# Altium PCB cs301_YourGroupNumber--4 holes.PcbDoc
Units mil, origin at the board's own origin, x right, y up, seen from the top; angles counter-clockwise.
Board outline 10825 x 6635 mil, 2 copper layers (Top Layer, Bottom Layer); 74 components, 39 nets, 199 pads, 12 vias.
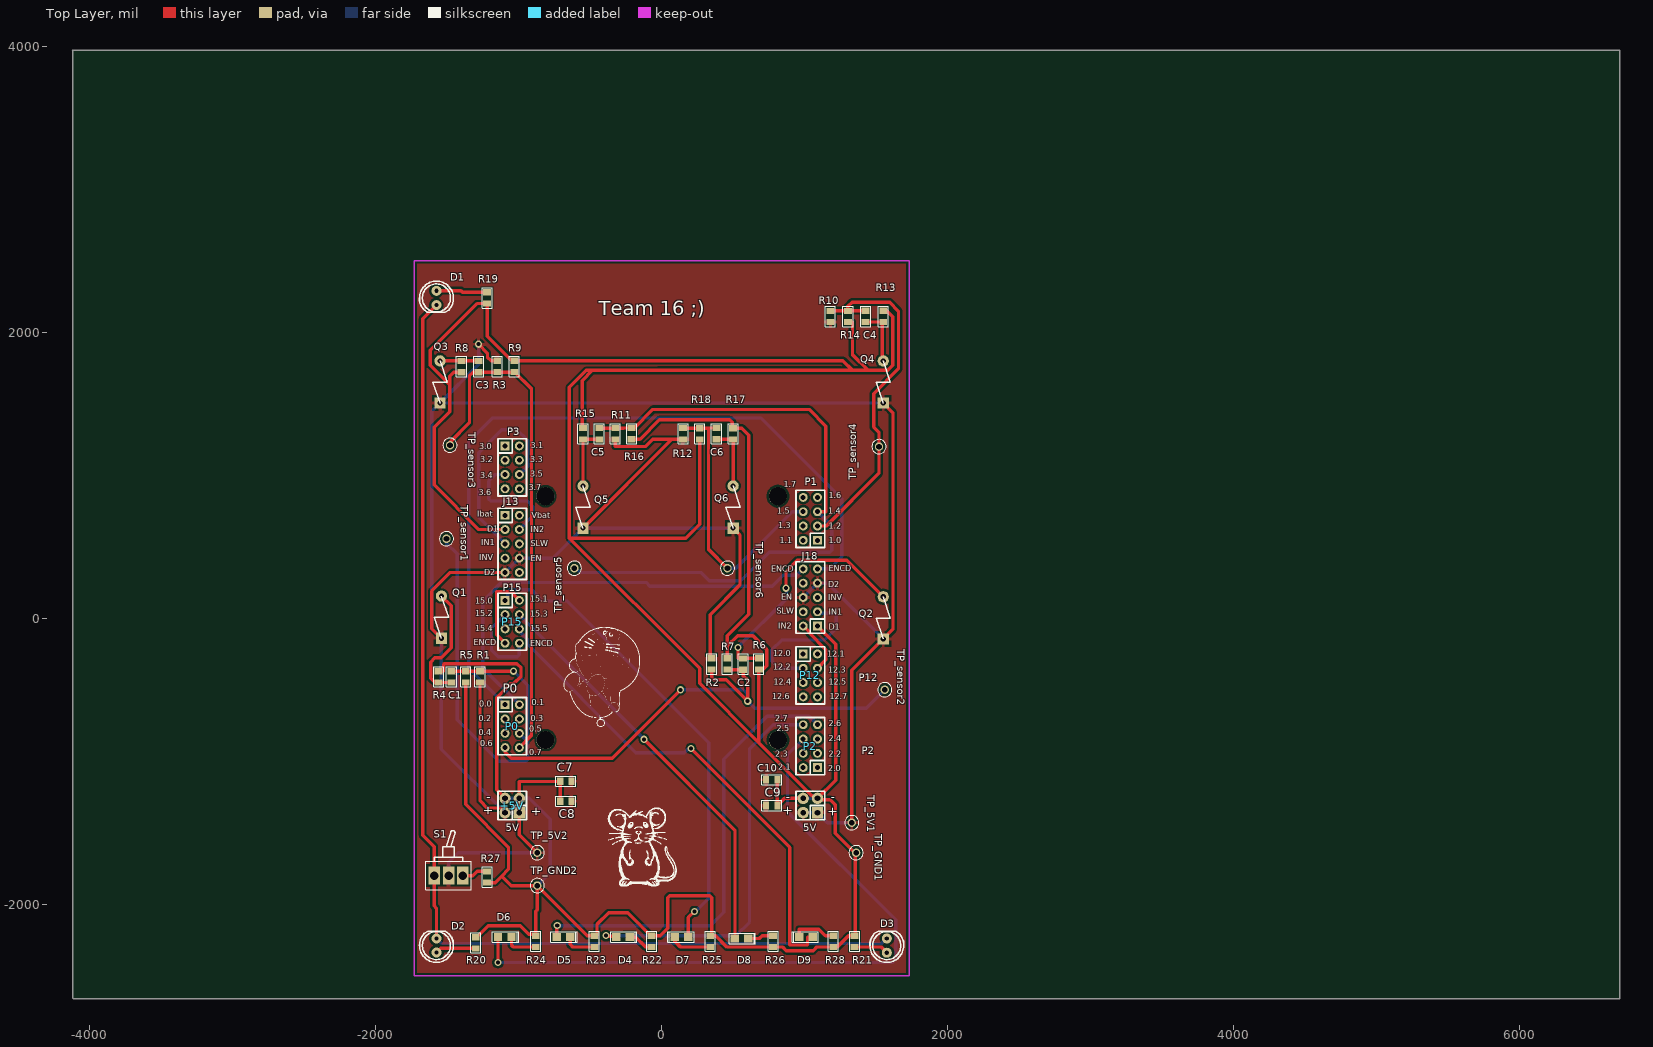
[diagram p0: Top Layer view]
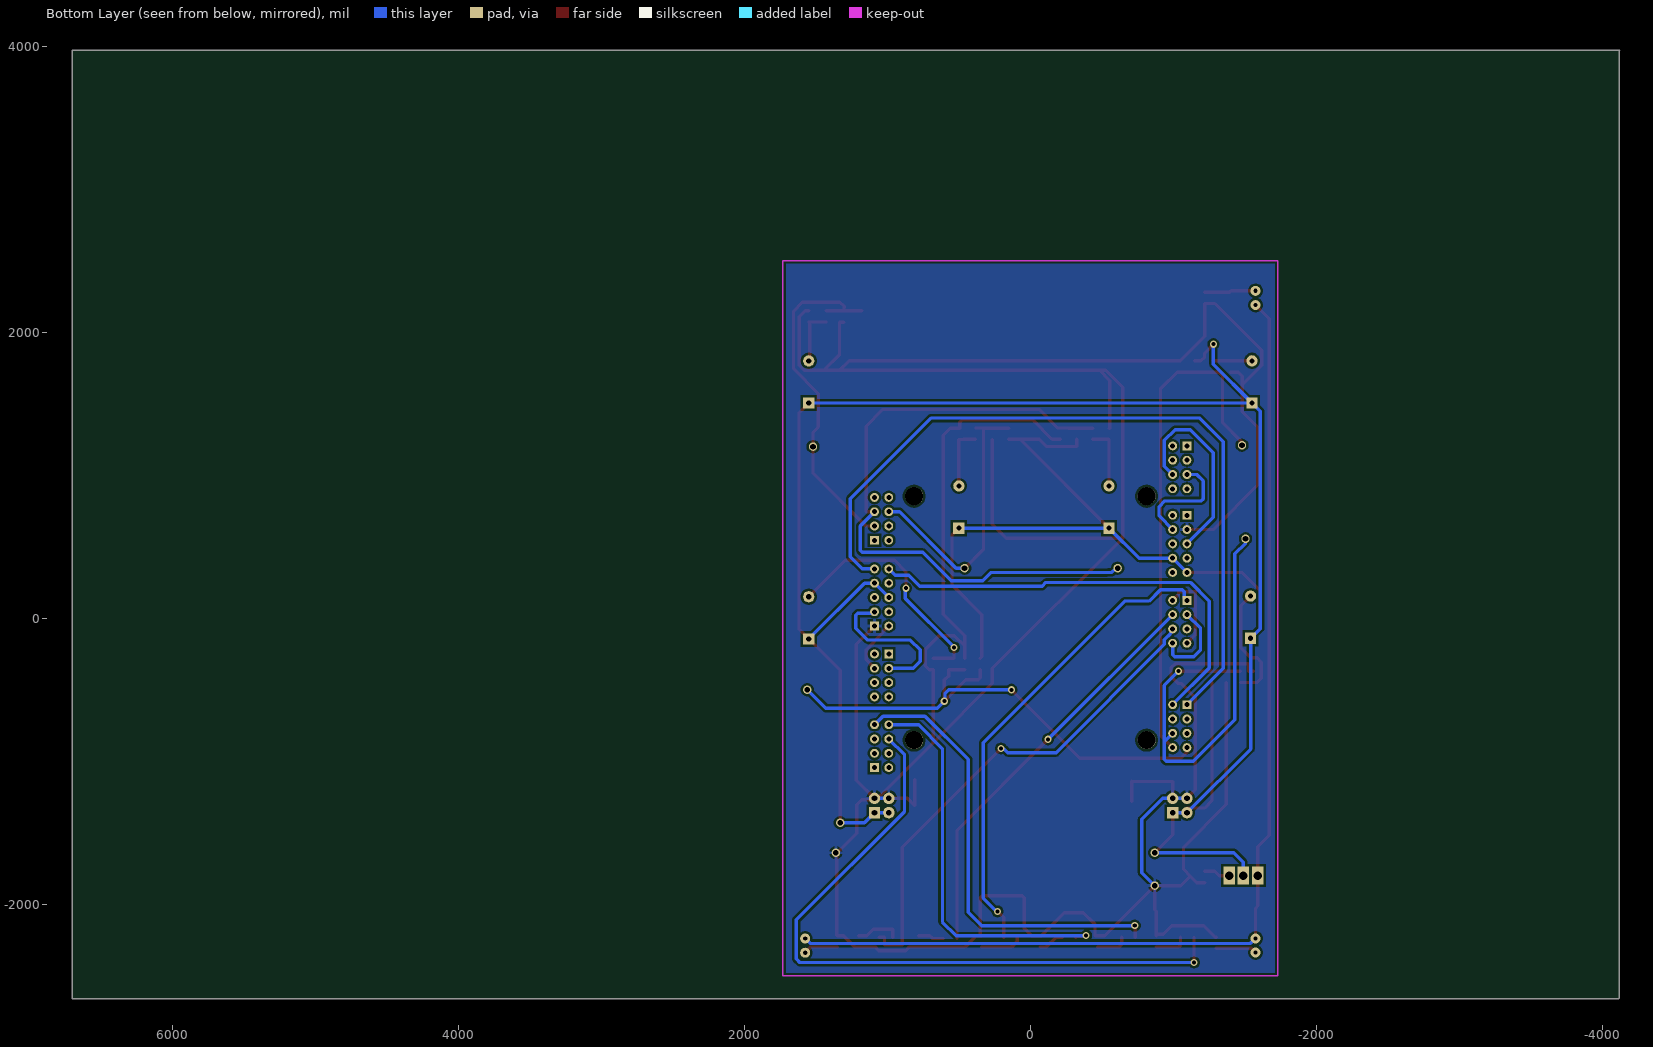
[diagram p1: Bottom Layer view, seen from below]

## Layer stack, top to bottom
Top Solder: solder mask 0.4, Solder Resist, Dk 3.5
Top Layer: signal copper 1.4
Dielectric1: dielectric 12.6, FR-4, Dk 4.8
Bottom Layer: signal copper 1.4
Bottom Solder: solder mask 0.4, Solder Resist, Dk 3.5

## Board outline
-4118.11,-2656.69 -4113.11,-2661.69 6701.89,-2661.69 6701.89,3973.31 -4123.11,3973.31 -4118.11,3968.31 -4118.11,-2656.69

## Design rules (kind name [scope] priority, off if disabled: settings)
Clearance [All] p1: gap=15.75 ignorepadtopadclearanceinfootprint=FALSE
Height [All] p1: minheight=0 maxheight=984.25 prefheight=500
HoleSize [All] p1: absolutevalues=TRUE maxlimit=393.7 minlimit=15.75 maxpercent=80.000 minpercent=20.000
PolygonConnect [All] p1: connectstyle=Relief reliefconductorwidth=23.62 reliefentries=4 polygonreliefangle="90 Angle" airgapwidth=15.75
RoutingVias [All] p1: holewidth=28 width=50 viastyle="Through Hole" minholewidth=28 minwidth=50 maxholewidth=28 maxwidth=50
SilkToSilkClearance [All] p1: silktosilkclearance=3.94
SilkToSolderMaskClearance SilkscreenOverComponentPads [IsPad] p1: minsilkscreentomaskgap=3.94 clearancetoexposedcopper=TRUE
SolderMaskExpansion [All] p1: expansion=4 istentingtop=FALSE
Width [All] p1: maxlimit=393.7 minlimit=15.75 preferedwidth=23.62
26 further rules are at their usual default settings.

## Components (designator, comment, footprint, x,y, rotation, side; value= is the part's Value field where it differs from the comment)
5V "5V" IDC4 1090,-1360 r90 top locked
+5V "5V" IDC4 -995,-1360 r90 top locked
C1 "*" "0805 CAP" -1470,-410 r90 top
C2 "*" "0805 CAP" 570,-320.63 r270 top
C3 "*" "0805 CAP" -1280,1760 r270 top
C4 "*" "0805 CAP" 1426.67,2110.63 r90 top
C5 "*" "0805 CAP" -436.67,1290 r90 top
C6 "*" "0805 CAP" 383.33,1290.63 r90 top
C7 "4.7uF" "0805 CAP" -670,-1140 r180 top
C8 "100nF" "0805 CAP" -670,-1280 r180 top
C9 "4.7nF" "0805 CAP" 770,-1310 r0 top
C10 "100nF" "0805 CAP" 770,-1130 r0 top
D1 "LED" LED0.1/5MM#1 -1574.8,2189.76 r180 top locked
D2 "LED" LED0.1/5MM#2 -1574.8,-2239.37 r0 top locked
D3 "LED" LED0.1/5MM#1 1574.8,-2239.37 r0 top locked
D4 "LTST-C170KGKT" "0805 LED" -270,-2230 r0 top
D5 "LTST-C170KGKT" "0805 LED" -687.24,-2230 r0 top
D6 "LTST-C170KGKT" "0805 LED" -1097.24,-2230 r0 top
D7 "LTST-C170KGKT" "0805 LED" 140,-2230 r180 top
D8 "LTST-C170KGKT" "0805 LED" 560,-2240 r0 top
D9 "LTST-C170KGKT" "0805 LED" 1010,-2230 r180 top
J13 "CON10" IDC10 -1095,720 r270 top locked
J18 "CON10" IDC10 1090,-55 r90 top locked
P0 "P0" idc8 -1095,-605 r270 top locked
P1 "P1" idc8 1090,545 r90 top locked
P2 "P2" idc8 1090,-1045 r90 top locked
P3 "P3" idc8 -1095,1205 r270 top locked
P12 "P12" idc8 990,-250 r270 top locked
P15 "P15" IDC8 -1095,125 r270 top locked
Q1 "VEMT3700" VEMT3700 -1390,-240 r90 top
Q2 "VEMT3700" VEMT3700 1700,-245 r90 top
Q3 "VEMT3700" VEMT3700 -1400,1405 r90 top
Q4 "VEMT3700" VEMT3700 1700,1405 r90 top
Q5 "VEMT3700" VEMT3700 -400,530 r90 top
Q6 "VEMT3700" VEMT3700 650,530 r90 top
R1 "*" "0805 RES" -1270,-410 r270 top
R2 "*" "0805 RES" 350,-320 r90 top
R3 "*" "0805 RES" -1150,1760.63 r90 top
R4 "*" "0805 RES" -1560,-410 r270 top
R5 "*" "0805 RES" -1370,-410 r90 top
R6 "*" "0805 RES" 680,-320 r90 top
R7 "*" "0805 RES" 460,-320 r270 top
R8 "*" "0805 RES" -1400,1760 r90 top
R9 "*" "0805 RES" -1030,1760.63 r270 top
R10 "*" "0805 RES" 1180,2110 r270 top
R11 "*" "0805 RES" -323.33,1290 r270 top
R12 "*" "0805 RES" 150,1290 r270 top
R13 "*" "0805 RES" 1550,2110.63 r270 top
R14 "*" "0805 RES" 1303.33,2110 r90 top
R15 "*" "0805 RES" -550,1290 r270 top
R16 "*" "0805 RES" -210,1290.63 r90 top
R17 "*" "0805 RES" 500,1289.37 r270 top
R18 "*" "0805 RES" 266.67,1289.37 r90 top
R19 "*" "0805 RES" -1220,2240 r90 top
R20 "*" "0805 RES" -1300,-2270 r270 top
R21 "*" "0805 RES" 1350,-2260 r270 top
R22 "*" "0805 RES" -70,-2260 r270 top
R23 "*" "0805 RES" -470,-2260 r270 top
R24 "*" "0805 RES" -880,-2260 r270 top
R25 "*" "0805 RES" 340,-2260 r270 top
R26 "*" "0805 RES" 780,-2260 r90 top
R27 "10k" "0805 RES" -1220,-1810 r90 top
R28 "*" "0805 RES" 1200,-2260 r90 top
S1 "SW-SPDT" SW-SPDT -1590,-1800 r0 top
TP_5V1 "5003" TP_TH 1330,-1430 r90 top
TP_5V2 "5003" TP_TH -870,-1640 r90 top
TP_GND1 "5003" TP_TH 1360,-1640 r90 top
TP_GND2 "5003" TP_TH -870,-1870 r90 top
TP_sensor1 "5003" TP_TH -1504.72,555.96 r90 top
TP_sensor2 "5003" TP_TH 1560,-500 r90 top
TP_sensor3 "5003" TP_TH -1480,1210 r90 top
TP_sensor4 "5003" TP_TH 1520,1200 r90 top
TP_sensor5 "5003" TP_TH -610,350 r90 top
TP_sensor6 "5003" TP_TH 460.41,350 r90 top

## Footprints (in the part's own frame and the unit in brackets; to place one, negate y for a bottom-side part, rotate by r counter-clockwise, add the part's x,y. Pads: shape width x height; smd on the part's side, far side on the other; paste and mask are expansions set on the pad)
"0805 CAP" [mm] "http://www.digikey.co.nz/Web%20Export/Supplier%20Content/Vishay_8026/PDF/VishayBeyschlag_SolderPad.pdf?redirected=1 with dimension G modified by +0.25mm"
  rect 1.1x1.4 smd: 1(-1,0) 2(1,0)
  silkscreen extent -1.8,-0.9 1.8,0.9, body extent -1.04,-0.66 1.04,0.66, height 0.61
"0805 LED" [mm] "RED AS AlGaAs SMD LED, Body; 2mm x 1.25 mm (LxW)"
  rect 1.5x1.4 smd: 1(-1.2,0) 2(1.2,0)
  silkscreen extent -2.2,-0.95 2.45,0.95, body extent -1,-0.63 1,0.63, height 1.1
"0805 RES" [mm] "http://www.digikey.co.nz/Web%20Export/Supplier%20Content/Vishay_8026/PDF/VishayBeyschlag_SolderPad.pdf?redirected=1 with dimension G modified by +0.25mm"
  rect 1.1x1.4 smd: 1(-1,0) 2(1,0)
  silkscreen extent -1.8,-0.9 1.8,0.9, body extent -1.04,-0.66 1.04,0.66, height 0.61
IDC4 [mil]
  rect 80x80 hole 40: 1(0,0)
  round 80 hole 40: 2(0,100) 3(100,0) 4(100,100)
  silkscreen extent -50,-50 150,150
idc8 [mil]
  rect 62x62 hole 35: 1(0,0)
  round 62 hole 35: 2(0,100) 3(100,0) 4(100,100) 5(200,0) 6(200,100) 7(300,0) 8(300,100)
  silkscreen extent -50,-50 350,150
IDC8 [mil]
  rect 62x62 hole 35: 1(0,0)
  round 62 hole 35: 2(0,100) 3(100,0) 4(100,100) 5(200,0) 6(200,100) 7(300,0) 8(300,100)
  silkscreen extent -50,-50 350,150
IDC10 [mil]
  rect 62x62 hole 35: 1(0,0)
  round 62 hole 35: 2(0,100) 3(100,0) 4(100,100) 5(200,0) 6(200,100) 7(300,0) 8(300,100) 9(400,0) 10(400,100)
  silkscreen extent -50,-50 450,150
LED0.1/5MM#1 [mil]
  round 70 hole 30: A(0,0) K(0,-100)
  silkscreen extent -118,-168 118,50
LED0.1/5MM#2 [mil]
  round 70 hole 30: A(0,0) K(0,-98.42)
  silkscreen extent -118,-168 118,50
SW-SPDT [mil]
  rect 80x125 hole 60: 1(0,0) 2(100,0) 3(200,0)
  silkscreen extent -60,-100 260,315
TP_TH [mm] "Test Point, Through Hole, Dia 2.54mm"
  round 1.5 hole 1: 1(0,0)
  silkscreen extent -1.27,-1.27 1.27,1.27, body extent -1.27,-1.27 1.27,1.27, height 4.57
VEMT3700 [mm]
  rect 2x2 hole 0.9: 1(2.54,3.81)
  round 2 hole 0.9: 2(10.033,3.81)
  silkscreen extent 2.54,2.54 10.03,5.08

## Part data
5V +5V: library part CON4, "Connector"
C1 C2 C3 C4 C5 C6 C7 C8 C9 C10: library part CerCap_SMT_0805, "SMT ceramic capacitor 0805 size"
D4 D5 D6 D7 D8 D9: library part LED_SMT_0805, "SMT LED 0805 size", Color=Green, Current - Test=20mA, Lens Color=Colorless, Manufacturer="Lite-On Inc.", Millicandela Rating=35mcd, Package / Case="0805 (2012 Metric)", Supplier Part Number 1=160-1414-1-ND, Voltage - Forward (Vf) (Typ)=2V, Category=Optoelectronics, ComponentLink1Description=http://optoelectronics.liteon.com/upload/download/DS22-2000-073/LTST-C170KGKT.pdf, ComponentLink1URL=http://optoelectronics.liteon.com/upload/download/DS22-2000-073/LTST-C170KGKT.pdf, Features=-, Height (Max)=1.10mm, Lens Style/Size="Rectangle with Flat Top, 1.40mm x 1.25mm", Lens Transparency=Clear, Manufacturer Part Number=LTST-C170KGKT, Mounting Type="Surface Mount", Packaging="Cut Tape (CT)", Part Status=Active, Pricing 1="1=0.62, 10=0.459, 25=0.338, 100=0.2415, 250=0.16416, 500=0.14486, 1000=0.11347 (NZD)", RoHS="RoHS Compliant", Size / Dimension="2.00mm L x 1.25mm W", Stock 1=503069, Supplier 1=Digi-Key, Viewing Angle=130°, Wavelength - Dominant=571nm, Wavelength - Peak=574nm
J13 J18: "Connector"
P0 P1 P2 P3: library part CON8, "Connector"
P12 P15: library part CON8_1, "Connector"
Q1 Q2 Q3 Q4 Q5 Q6: "Silicon NPN Phototransistor"
R1 R2 R3 R4 R5 R6 R7 R8 R9 R10 R11 R12 R13 R14 R15 R16 R17 R18 R19 R20 R21 R22 R23 R24 R25 R26 R27 R28: library part Res_SMT_0805, "0805 resistor", ComponentLink1Description=https://nz.mouser.com/datasheet/2/315/AOA0000C304-1149620.pdf, LatestRevisionDate=17-Jul-2002, LatestRevisionNote="Re-released for DXP Platform.", PackageReference=AXIAL-0.4, Published=8-Jun-2000, Publisher="Altium Limited"
S1: "Toggle Switch"
TP_5V1 TP_5V2 TP_GND1 TP_GND2 TP_sensor1 TP_sensor2 TP_sensor3 TP_sensor4 TP_sensor5 TP_sensor6: library part TestPoint, "Test Point, Orange, 1-Pin THD, RoHS", Forward Current="3 A", Forward Voltage="1.08 V", Max Operating Temperature="150 degC", Max Surge Current="80 A", Min Operating Temperature="-65 degC", Package Quantity=500, Peak Reverse Current="600 uA", ComponentLink1Description="Manufacturer URL", ComponentLink1URL=http://www.keyelco.com/, ComponentLink2Description=Datasheet, ComponentLink2URL=http://keyelco.com/userAssets/file/M65p56.pdf, DatasheetVersion=Jun-15, Diameter="5.3 mm", Height="0.25 inch", Length="9.5 mm", Mount="Through Hole", PackageDescription="1-Pin Through Hole Device, Dia 2.54 mm", PackageReference=5003, Packaging=Bulk, Pins=2, Radiation Hardening=No, REACH SVHC="No SVHC", RoHSCompliant=true, Weight="0.01 lb", Width="0.25 inch"

## Free pads (board coordinates)
  round 125.98 hole 125.98 unplated: 1(-813,-853) 1(-813,853) 1(813,-853) 1(813,853)

## Via types
v1: diameter 50, hole 28, Top Layer to Bottom Layer, 12 vias

## Nets (pads, with @x,y where several pads share a name; then routed paths per layer and width w, separated by ;. In a path a pad name is that pad's centre, name@x,y a point inside that pad or via, vN(x,y) a via of type N, cw(c..) or ccw(c..) an arc to the next point about the centre after c; other vN are vias at no path point)
0.5: C1.2 P0.6 R1.1 R5.2 TP_sensor1.1 | length 3091
  Top Layer w23.62: C1.2 R5.2 R1.1 v1(-1035.8,-370.63)
  Bottom Layer w23.62: TP_sensor1.1 -1504.72,524.72 -1430,450 -1430,-710 -1140,-1000 -949.95,-1000 -936.11,-986.16 -936.11,-863.89 ; v1(-1035.8,-370.63) -936.11,-470.31 -936.11,-863.89 ; P0.6 -936.11,-863.89
0.6: C2.2 P0.7 R2.1 R7.2 TP_sensor2.1 | length 3763.6
  Top Layer w23.62: P0.7 -1095,-937.8 -1052.8,-980 -346.42,-980 v1(132.89,-500.69) ; R2.1 350,-416.16 363.84,-430 451.52,-430 v1(602.21,-580.69) 602.21,-429.69 570.89,-404.75 570.89,-360 C2.2 554.25,-360 513.18,-359.37 475.75,-359.37 R7.2
  Bottom Layer w23.62: v1(132.89,-500.69) 570.89,-500.69 597.16,-526.97 597.16,-575.65 v1(602.21,-580.69) 651.52,-630 1430,-630 TP_sensor2.1
0.7: C3.2 P0.8 R3.1 R9.2 TP_sensor3.1 | length 3578.9
  Top Layer w23.62: TP_sensor3.1 -1480,1230 -1344.11,1365.89 -1344.11,1694.63 -1318.11,1720.63 C3.2 -1216.11,1720.63 -1215.48,1721.26 R3.1 R9.2 -1027.11,1721.26 -910,1604.15 -910,-820 P0.8
1.2: C4.2 P1.3 R10.1 R14.2 TP_sensor4.1 | length 2474.1
  Top Layer w23.62: P1.3 1152.3,645 1520,1012.7 1520,1300 1482.89,1337.11 1482.89,1569.7 1656.3,1743.11 1656.3,2148.13 1594.75,2209.68 1331.89,2209.68 1302.89,2180.68 R14.2 ; R10.1 R14.2 ; C4.2 1339.89,2150 1339.26,2149.37 R14.2
1.4: C5.2 P1.5 R11.1 R16.2 TP_sensor5.1 | length 4581.2
  Top Layer w23.62: C5.2 R11.1 -267.11,1329.37 -266.48,1330 R16.2 -191.11,1330 -61.11,1460 1032.2,1460 1148.89,1343.31 1148.89,745 P1.5
  Bottom Layer w23.62: TP_sensor5.1 -600.41,350 -570.41,320 -540,320 -539.31,319.31 275.89,319.31 332.28,262.91 554.49,262.91 751.58,460 1176.16,460 1190,473.84 1190,645 P1.5
1.5: C6.2 P1.6 R12.1 R18.2 TP_sensor6.1 | length 1961.9
  Top Layer w23.62: R12.1 207.89,1329.37 208.52,1328.74 R18.2 327.89,1328.74 ; C6.2 327.89,1330 327.89,1328.74 ; TP_sensor6.1 460,350.01 327.89,482.12 327.89,1328.74
  Bottom Layer w23.62: TP_sensor6.1 520,350 915,745 P1.6
2.5: D6.1 P2.6 | length 4867
  Top Layer w23.62: v1(-1144.49,-2407.69) D6.1
  Bottom Layer w23.62: v1(-1144.49,-2407.69) 1611.89,-2407.69 1637.89,-2381.69 1637.89,-2109.69 880,-1351.8 880,-955 P2.6
2.6: D5.1 P2.7 | length 3159
  Top Layer w23.62: D5.1 -732.24,-2227.76 -732.24,-2152.24 v1(-730,-2150)
  Bottom Layer w23.62: v1(-730,-2150) 341.35,-2150 434.66,-2056.69 434.66,-987.92 736.89,-685.69 1030.69,-685.69 P2.7
2.7: D4.1 P2.8 | length 2779.8
  Top Layer w23.62: v1(-390,-2220) -385,-2225 -322.24,-2225 D4.1
  Bottom Layer w23.62: v1(-390,-2220) -388.31,-2221.69 517.89,-2221.69 614.89,-2124.69 614.89,-911.69 781.58,-745 P2.8
3.4: J13.4 P3.5 | length 791.5
  Bottom Layer w23.62: P3.5 -1165,1005 -1210,960 -1210,833.84 -1196.16,820 -940,820 -900,780 -900,715 J13.4
3.5: J13.5 P3.6 | length 1419.2
  Bottom Layer w23.62: J13.5 -1280,705 -1280,1157.42 -1118.11,1319.31 -1012.11,1319.31 -936.11,1243.31 -936.11,1063.89 P3.6
12.2: J18.3 P12.3 | length 1063
  Bottom Layer w23.62: P12.3 820,-350 770,-300 770,-221.76 839.07,-152.69 1137.31,-152.69 1220,-70 1220,21.47 1206.16,35.31 1099.69,35.31 J18.3
12.3: J18.2 P12.4 | length 385.2
  Top Layer w23.62: J18.2 1030.89,-95.89 1030.89,-101.69 1148.89,-219.69 1148.89,-291.11 P12.4
15: D7.1 P15.1 | length 3347.2
  Top Layer w23.62: D7.1 187.24,-2092.76 v1(230,-2050)
  Bottom Layer w23.62: P15.1 -1075.81,144.19 -1075.81,186.16 -1061.97,200 -910,200 -830,120 -660,120 330,-870 330,-1957.14 237.14,-2050 v1(230,-2050)
15.3: D8.1 P15.4 | length 2889.5
  Top Layer w23.62: v1(-123.27,-846.73) 512.76,-1482.76 D8.1
  Bottom Layer w23.62: P15.4 v1(-123.27,-846.73)
15.5: D9.1 P15.6 | length 3475.9
  Top Layer w23.62: v1(204.89,-910.69) 897.32,-1603.12 897.32,-2285.12 1019.89,-2285.12 1019.89,-2230 D9.1
  Bottom Layer w23.62: P15.6 -995,-85.39 -980.24,-100.15 -980.24,-106.95 -936.44,-150.74 -936.44,-183.56 -180,-940 157.86,-940 182.12,-915.74 199.84,-915.74 v1(204.89,-910.69)
+5V: 5V.1 5V.2 +5V.1 +5V.2 C7.1 C8.1 C9.1 C10.1 J13.8 J13.9 J18.6 J18.7 Q1.1 Q2.1 Q3.1 Q4.1 Q5.1 Q6.1 R1.2 R2.2 R3.2 R10.2 R11.2 R12.2 S1.2 TP_5V1.1 TP_5V2.1 | length 18452.5
  Top Layer w23.62: Q1.1 -1606.93,-73.07 -1606.93,190.49 -1477.42,320 J13.9 ; v1(-1280.11,1916.31) -1218.11,1854.31 -1218.11,1825 -1193.11,1800 R3.2 ; R1.2 -1270.11,-449.37 -1270.11,-1275.69 -1218.11,-1327.69 -1095,-1327.69 +5V.2 ; +5V.1 -995,-1515 TP_5V2.1 ; Q5.1 70.63,1250.63 ; R11.2 -324.11,1250.63 -324.11,1201.31 -110.34,1201.31 -61.02,1250.63 70.63,1250.63 ; R12.2 70.63,1250.63 ; R2.2 349.84,-280.63 340,-270.79 340,24.42 547.89,232.31 547.89,582.11 Q6.1 ; TP_5V1.1 1330,-365 Q2.1 1617.89,-77.11 1617.89,1437.11 Q4.1
  Bottom Layer w23.62: S1.2 -1490,-1706.69 -1423.31,-1640 TP_5V2.1 ; v1(-1280.11,1916.31) -1280.11,1774.89 Q3.1 ; J13.9 -1095,320.11 -995.11,420 J13.8 -760,420 Q5.1 Q6.1 ; +5V.1 +5V.2 -1540,-915 Q1.1 -1607.11,-72.89 -1607.11,1447.89 Q3.1 ; 5V.2 5V.1 1160,-1430 TP_5V1.1 ; J18.6 990,145.11 1089.89,245 J18.7 1160,245 Q2.1 ; Q4.1 1549.31,1504.31 -1463.8,1505 Q3.1
ENCD_L1: P15.2 P15.7 | length 578.1
  Top Layer w23.62: P15.7 -1154.11,-115.89 -1154.11,184.31 -1036.11,184.31 -1036.11,166.11 P15.2
ENCD_L2: P15.3 P15.8 | length 587.5
  Bottom Layer w23.62: P15.3 -1190,-70 -1190,-222.11 -1142.11,-270 -1010,-270 -995,-255 P15.8
ENCD_R1: J18.9 P0.1 | length 5467.4
  Bottom Layer w23.62: P0.1 -1350,-350 -1350,1233.42 -1183.42,1400 695.2,1400 1260,835.2 1260,430 1175,345 J18.9
ENCD_R2: J18.10 P0.2 | length 3185.7
  Bottom Layer w23.62: P0.2 -995,-603.22 -1250,-348.22 -1250,120 -1120,250 -108.62,250 -82.16,223.54 773.54,223.54 850,300 945,300 J18.10
GND: 5V.3 5V.4 +5V.3 +5V.4 C7.2 C8.2 C9.2 C10.2 J13.3 J18.1 R4.1 R5.1 R6.1 R7.1 R8.1 R9.1 R13.1 R14.1 R15.1 R16.1 R17.1 R18.1 R19.1 R20.1 R21.1 R22.1 R23.1 R24.1 R25.1 R26.1 R27.1 R28.1 TP_GND1.1 TP_GND2.1 | length 29473.1
  Top Layer w23.62: R4.1 -1525.12,-370.63 -1525.12,-320.69 -1522.12,-317.69 -1012.31,-317.69 -983.11,-346.89 -983.11,-406.69 -1033.11,-456.69 -1054.11,-456.69 -1154.11,-556.69 -1154.11,-1200.89 +5V.4 ; R8.1 -1454.79,1720.63 -1482.11,1693.31 -1482.11,1633.49 ; R5.1 -1369.11,-449.37 -1369.11,-1302.69 -1071.11,-1600.69 -1071.11,-1756.69 -1117.45,-1803.03 ; R20.1 -1294.09,-2230.63 -1213.47,-2150 -990,-2150 -929.21,-2210.79 -889.84,-2210.79 R24.1 -880,-2050.69 -870,-2040.69 TP_GND2.1 ; R27.1 -1163.79,-1849.37 -1117.45,-1803.03 ; R19.1 R19.1@-1220.11,2200.63 ; J13.3 -1277.8,620 -1590,932.2 -1590,1336.42 -1482.11,1444.31 -1482.11,1633.49 ; +5V.3 -995,-1145 C7.2 C8.2 ; R15.1 -556.11,1329.37 -556.11,1662.31 -485.35,1733.07 ; R16.1 -151.11,1251.26 -15.06,1387.31 476.89,1387.31 493.89,1370.31 493.89,1328.74 R17.1 561.26,1328.74 610,1280 610,28.42 459.89,-121.69 459.89,-193.69 ; R18.1 265.89,1250 265.89,656.31 168.89,559.31 -644.91,559.31 ; R7.1 459.89,-280.63 459.89,-193.69 ; C10.2 C9.2 859.37,-1260 5V.4 ; J18.1 1216.89,-181.89 1216.89,-1133.11 5V.3 ; R14.1 1334.89,2070.63 1334.89,1843.31 1445.13,1733.07 ; R13.1 1575.43,2150 1616.93,2108.5 1616.93,1768.11 1581.89,1733.07 1445.13,1733.07 ; -1482.11,1633.49 -1616.93,1768.31 -1616.93,1875.31 -1291.61,2200.63 R19.1@-1220.11,2200.63 ; R19.1@-1220.11,2200.63 -1220.11,1971 -1049.11,1800 R9.1 -718.11,1800 1267.65,1800.31 1334.89,1733.07 ; -1117.45,-1803.03 -1050.48,-1870 TP_GND2.1 ; TP_GND2.1 -519.37,-2220.63 R23.1 -451.9,-2220.63 -451.9,-2141.9 -370,-2060 -236.74,-2060 -76.11,-2220.63 R22.1 -10.63,-2220.63 42.83,-2167.17 42.83,-1953.84 56.66,-1940 336.16,-1940 350,-1953.84 350,-2210.79 340.16,-2220.63 R25.1 378.15,-2220.63 456.89,-2299.37 R26.1 845.45,-2299.37 870.57,-2324.49 1059.21,-2324.49 1084.33,-2299.37 R28.1 1228.15,-2299.37 1306.89,-2220.63 R21.1 1353.22,-2217.41 1353.22,-1642.81 1214.89,-1504.48 1214.89,-1304.89 1180,-1270 1100,-1270 5V.3 ; -644.91,559.31 265.89,-351.49 265.89,-455.89 680,-870 ; -644.91,559.31 -644.91,1615.51 -527.35,1733.07 -485.35,1733.07 ; -485.35,1733.07 -30.29,1733.07 -30.05,1733.31 879.59,1733.31 879.83,1733.07 1334.89,1733.07 ; 459.89,-193.69 531.89,-121.69 638.89,-121.69 735.89,-218.69 735.89,-331.69 708.21,-359.37 R6.1 680,-870 ; 680,-870 1050.28,-1240.28 1055.03,-1240.28 1074.74,-1260 5V.3 ; 1334.89,1733.07 1445.13,1733.07
  Bottom Layer w23.62: +5V.4 +5V.3 -927.11,-1260 -780,-1407.11 -780,-1780 TP_GND2.1 ; 5V.4 5V.3
NetC1_1: C1.1 Q1.2 R4.2 | length 844.7
  Top Layer w23.62: Q1.2 -1472.11,87.11 -1472.11,-206.69 -1542.49,-277.07 -1585.5,-277.07 -1615.12,-306.69 -1615.12,-419.84 -1585.59,-449.37 R4.2 C1.1
NetC2_1: C2.1 Q2.2 R6.2 | length 1716.1
  Top Layer w23.62: v1(533.89,-204.69) 533.89,-281.26 C2.1 623.89,-281.26 624.52,-280.63 R6.2 ; v1(870,210) 870,326.42 947.89,404.31 1295.69,404.31 Q2.2
  Bottom Layer w23.62: v1(533.89,-204.69) 876.34,137.76 876.34,161.38 875.05,162.67 875.05,204.95 v1(870,210)
NetC3_1: C3.1 Q3.2 R8.2 | length 270.3
  Top Layer w23.62: Q3.2 -1476.11,1800 -1475.48,1799.37 R8.2 C3.1
NetC4_1: C4.1 Q4.2 R13.2 | length 397
  Top Layer w23.62: C4.1 R13.2@1544.09,2071.26 ; Q4.2 1544.09,1805.91 R13.2@1544.09,2071.26 ; R13.2 R13.2@1544.09,2071.26
NetC5_1: C5.1 Q5.2 R15.2 | length 439
  Top Layer w23.62: Q5.2 R15.2 C5.1
NetC6_1: C6.1 Q6.2 R17.2 | length 442.2
  Top Layer w23.62: C6.1 470.66,1251.26 471.92,1250 R17.2 Q6.2
NetD1_A: D1.A D2.A D3.A S1.1 | length 7686.8
  Top Layer w23.62: D2.A -1574.8,-2027.69 -1590,-2012.49 S1.1 -1590,-1597.8 -1670,-1517.8 -1670,2094.57 D1.A
  Bottom Layer w23.62: D2.A -1539.55,-2274.63 1539.55,-2274.63 D3.A
NetD1_K: D1.K R19.2 | length 359.1
  Top Layer w23.62: D1.K -1403.11,2289.76 -1392.72,2279.37 R19.2
NetD2_K: D2.K R20.2 | length 286.6
  Top Layer w23.62: D2.K -1546.38,-2309.37 R20.2
NetD3_K: D3.K R21.2 | length 241.4
  Top Layer w23.62: R21.2 1534.8,-2299.37 D3.K
NetD4_2: D4.2 R22.2 | length 181.5
  Top Layer w23.62: D4.2 -181.11,-2230 -111.74,-2299.37 R22.2
NetD5_2: D5.2 R23.2 | length 228
  Top Layer w23.62: D5.2 -640,-2280 -620.63,-2299.37 R23.2
NetD6_2: D6.2 R24.2 | length 231.3
  Top Layer w23.62: D6.2 -1050,-2285.53 -1036.16,-2299.37 R24.2
NetD7_2: D7.2 R25.2 | length 293.7
  Top Layer w23.62: D7.2 92.76,-2260.24 131.89,-2299.37 R25.2
NetD8_2: D8.2 R26.2 | length 180.8
  Top Layer w23.62: D8.2 683.89,-2240 703.26,-2220.63 R26.2
NetD9_2: D9.2 R28.2 | length 311.6
  Top Layer w23.62: D9.2 962.76,-2174.69 1099.95,-2174.69 1145.89,-2220.63 R28.2
NetR27_2: R27.2 S1.3 | length 182.2
  Top Layer w23.62: S1.3 -1320.11,-1800 -1290.74,-1770.63 R27.2
pads on no net: J13.1 J13.2 J13.6 J13.7 J13.10 J18.4 J18.5 J18.8 P0.3 P0.4 P0.5 P1.1 P1.2 P1.4 P1.7 P1.8 P2.1 P2.2 P2.3 P2.4 P2.5 P3.1 P3.2 P3.3 P3.4 P3.7 P3.8 P12.1 P12.2 P12.5 P12.6 P12.7 P12.8 P15.5

## Polygon pours and split planes (outlines as drawn)
GND on Bottom Layer "GND_L02_P004" (solid, pour order 4): -1710,2480 1720,2480 1720,-2480 -1710,-2480
+5V on Top Layer "+5V_L01_P002" (solid, pour order 2): -1730,2500 -1710,2480 1720,2480 1720,-2480 -1710,-2480 -1710,2470 -1740,2500

## Keep-outs
Keep-Out Layer:
  lines w10: -1730,-2500 1730,-2500 1730,2500 -1730,2500 -1730,-2500

## Silkscreen, mask and mechanical layers (free items; w line width, h text height)
Top Overlay:
  drawing of 59 lines, arcs and shapes, not listed
  text "Team 16 ;)" at -440,2120 h100
  text "3.1" at -915,1190 h40
  text "3.0" at -1275,1180 h40
  text "3.2" at -1270,1090 h40
  text "3.3" at -920,1090 h40
  text "3.5" at -920,990 h40
  text "3.4" at -1270,980 h40
  text "1.7" at 855,915 h40
  text "3.7" at -930,895 h40
  text "3.6" at -1280,860 h40
  text "1.6" at 1170,840 h40
  text "1.5" at 810,730 h40
  text "1.4" at 1165,730 h40
  text "Ibat" at -1290,710 h40
  text "Vbat" at -910,700 h40
  text "1.3" at 815,630 h40
  text "1.2" at 1170,625 h40
  text "D1" at -1220,605 h40
  text "IN2" at -915,600 h40
  text "1.1" at 825,525 h40
  text "1.0" at 1170,525 h40
  text "IN1" at -1260,510 h40
  text "SLW" at -915,505 h40
  text "INV" at -1275,405 h40
  text "EN" at -915,400 h40
  text "ENCD" at 1170,330 h40
  text "ENCD" at 765,325 h40
  text "D2" at -1240,300 h40
  text "D2" at 1165,215 h40
  text "EN" at 835,130 h40
  text "INV" at 1165,125 h40
  text "15.1" at -920,115 h40
  text "15.0" at -1305,100 h40
  text "SLW" at 805,30 h40
  text "IN1" at 1170,25 h40
  text "15.2" at -1305,15 h40
  text "15.3" at -920,10 h40
  text "IN2" at 815,-75 h40
  text "D1" at 1170,-80 h40
  text "15.4" at -1305,-90 h40
  text "15.5" at -920,-90 h40
  text "ENCD" at -1315,-190 h40
  text "ENCD" at -920,-195 h40
  text "12.0" at 780,-265 h40
  text "12.1" at 1160,-270 h40
  text "12.2" at 780,-360 h40
  text "12.3" at 1165,-380 h40
  text "12.4" at 785,-465 h40
  text "12.5" at 1170,-465 h40
  text "12.6" at 775,-565 h40
  text "12.7" at 1175,-565 h40
  text "0.1" at -910,-610 h40
  text "0.0" at -1275,-620 h40
  text "0.2" at -1280,-720 h40
  text "0.3" at -915,-720 h40
  text "2.7" at 795,-720 h40
  text "2.6" at 1170,-755 h40
  text "2.5" at 805,-790 h40
  text "0.5" at -925,-795 h40
  text "0.4" at -1280,-820 h40
  text "2.4" at 1170,-860 h40
  text "0.6" at -1270,-895 h40
  text "0.7" at -925,-960 h40
  text "2.3" at 795,-970 h40
  text "2.2" at 1170,-970 h40
  text "2.1" at 815,-1060 h40
  text "2.0" at 1165,-1070 h40
  text "-" at -1195,-1230 h60 r180
  text "-" at -850,-1230 h60 r180
  text "-" at 900,-1230 h60 r180
  text "-" at 1215,-1230 h60 r180
  text "+" at -1185,-1380 h60 r90
  text "+" at 910,-1380 h60 r90
  text "+" at -850,-1390 h60 r90
  text "+" at 1225,-1390 h60 r90